# Altium PCB Main.PcbDoc
Units mm, origin at the board's own origin, x right, y up, seen from the top; angles counter-clockwise.
Board outline 66.29 x 57.53 mm, 2 copper layers (Top Layer, Bottom Layer); 28 components, 26 nets, 129 pads, 41 vias.
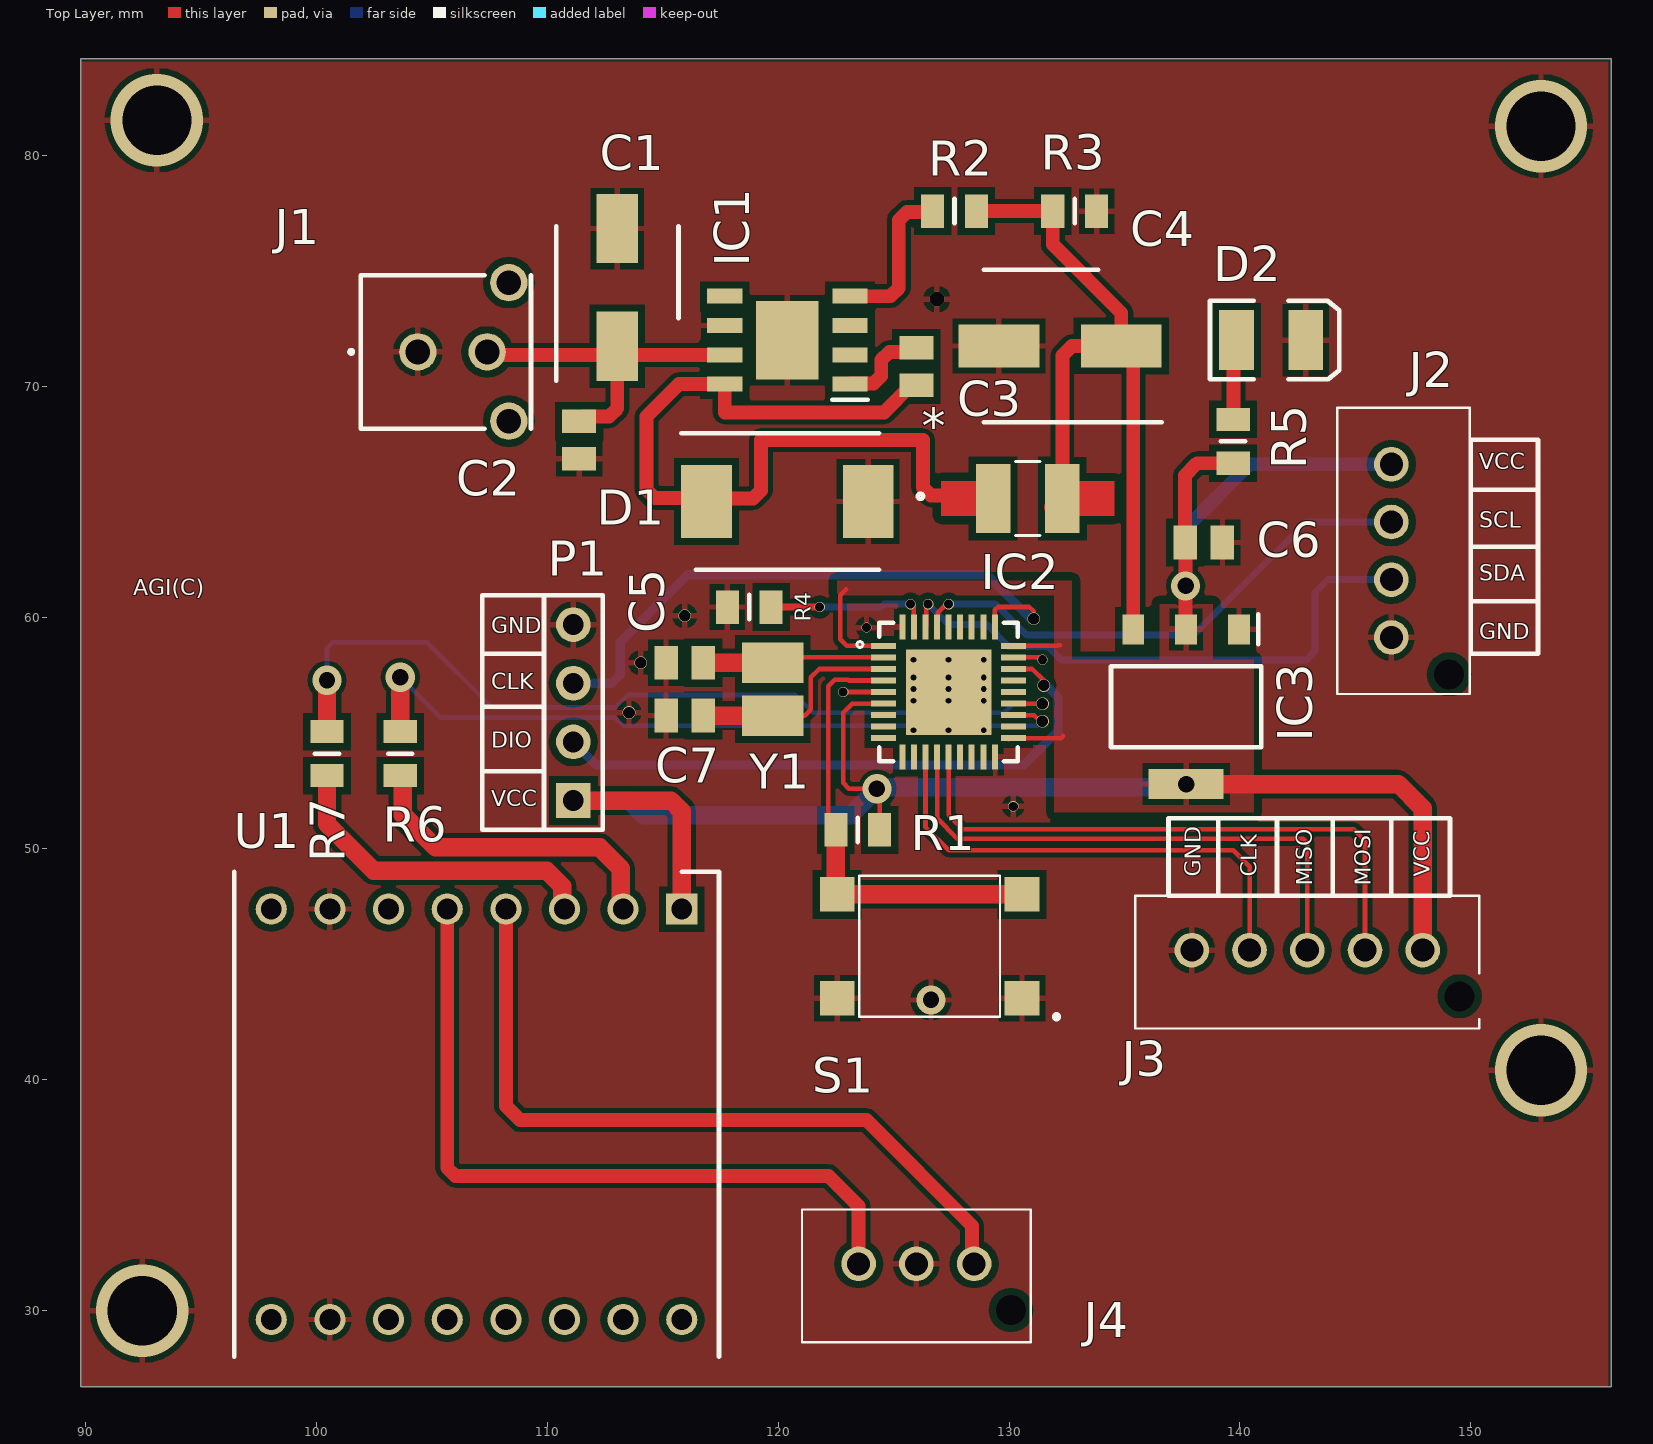
[diagram p0: Top Layer view]
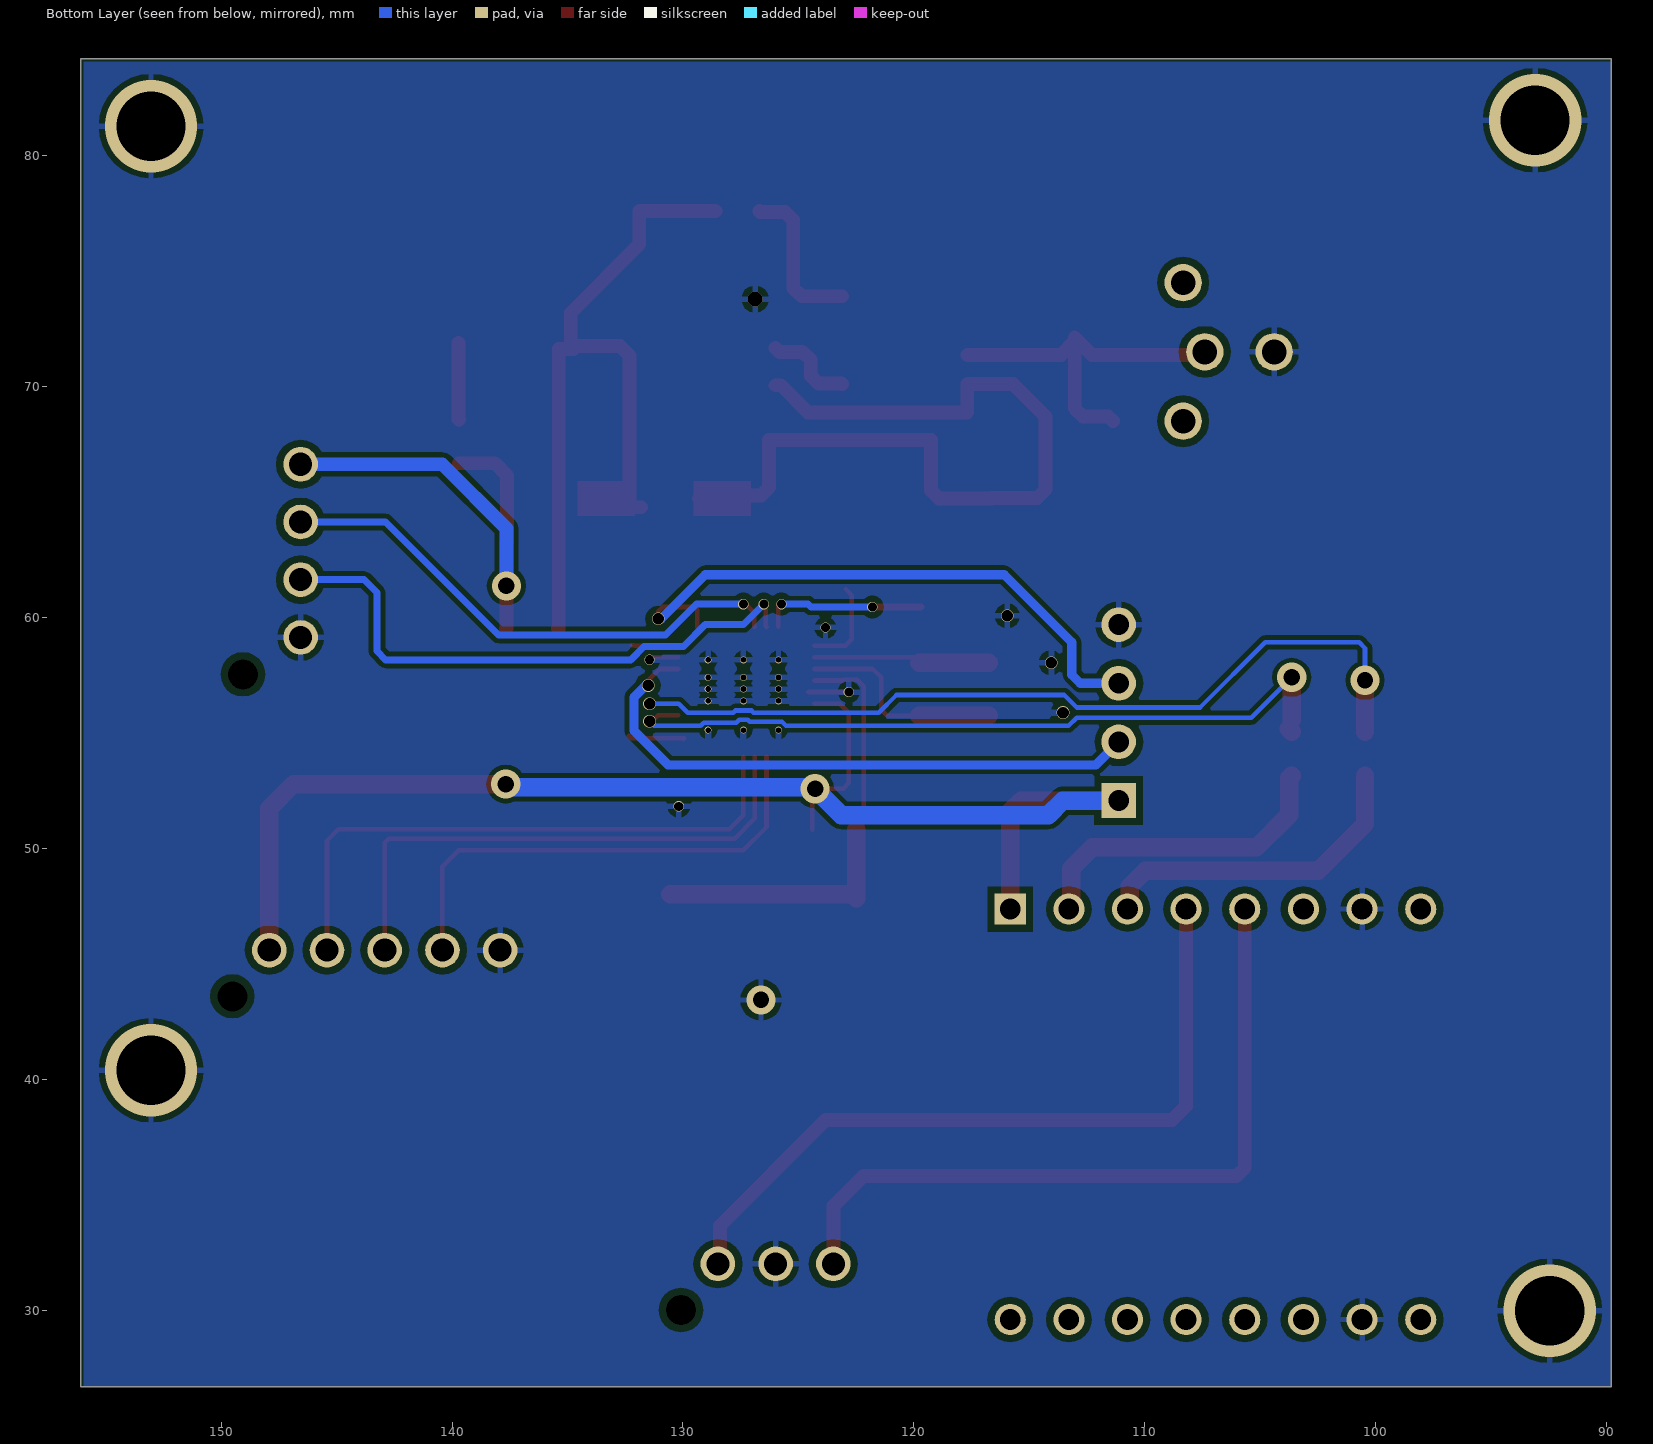
[diagram p1: Bottom Layer view, seen from below]
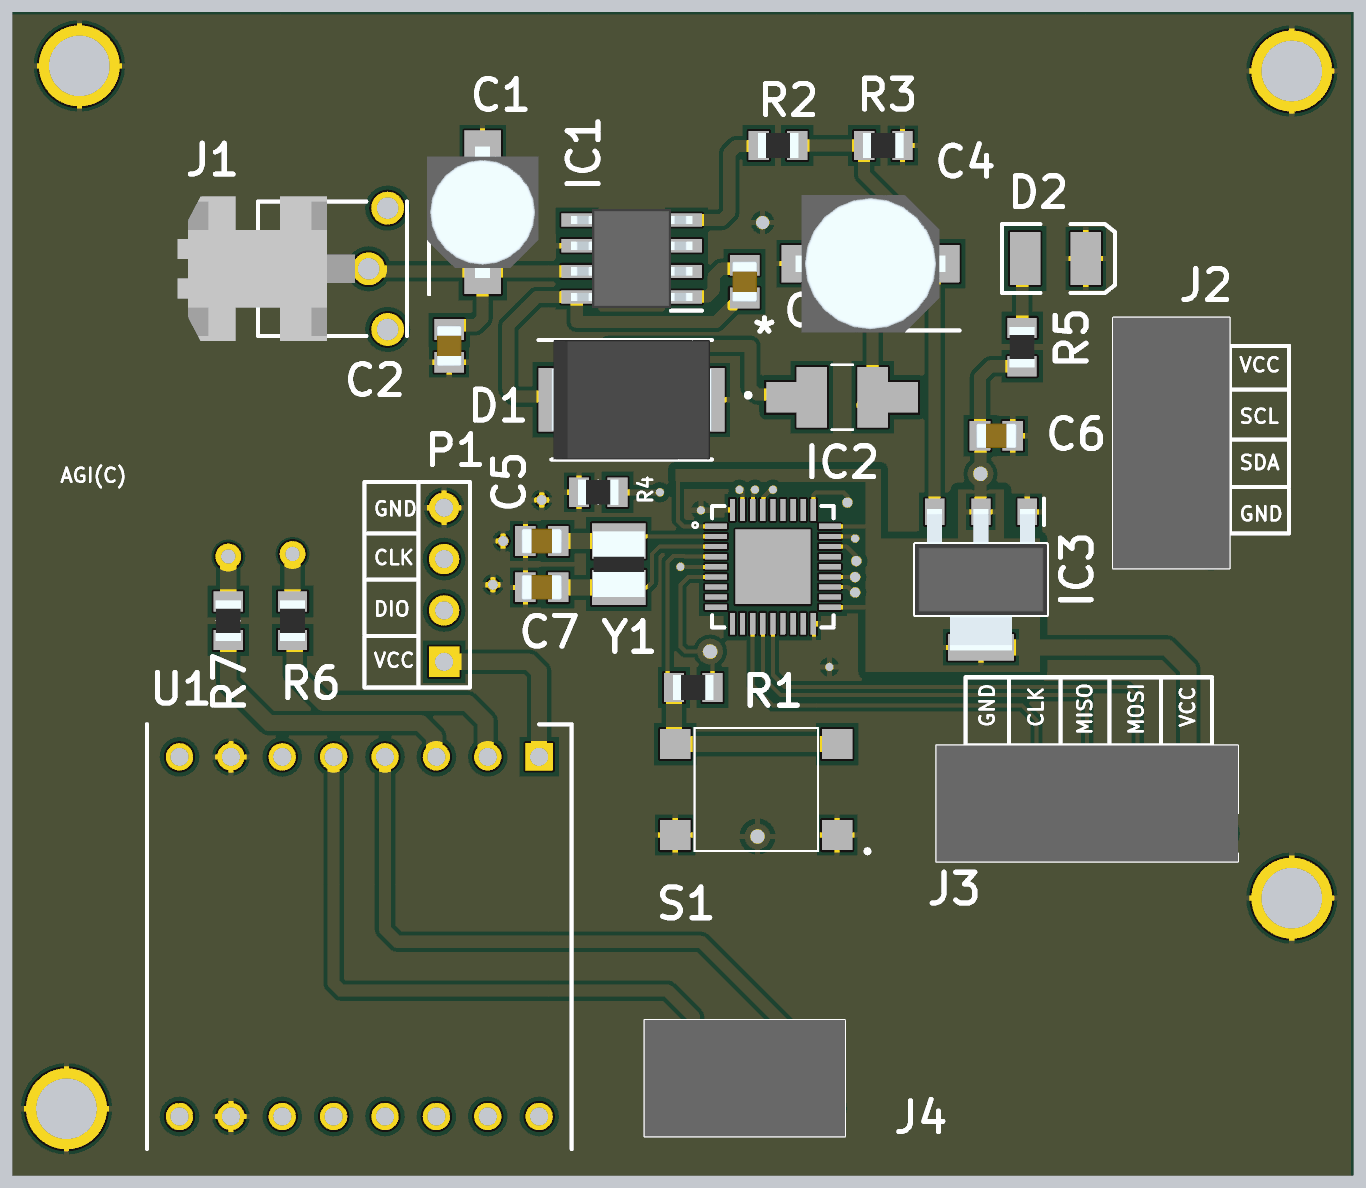
[diagram p2: 3D render of the assembled board from above, using the file's embedded part models]

## Layer stack, top to bottom
Top Solder: solder mask 0.0102, Solder Resist, Dk 3.5
Top Layer: signal copper 0.0356
Dielectric 1: dielectric 0.32, FR-4, Dk 4.8
Bottom Layer: signal copper 0.0356
Bottom Solder: solder mask 0.0102, Solder Resist, Dk 3.5

## Board outline
89.789,26.67 89.789,84.201 156.083,84.201 156.083,26.67
cut-out: 158.877,83.82

## Design rules (kind name [scope] priority, off if disabled: settings)
Clearance [All] p1: gap=0.2 ignorepadtopadclearanceinfootprint=FALSE except(0.3: SMDPad-Fill SMDPad-Poly SMDPad-Region THPad-THPad THPad-Via THPad-Fill THPad-Poly THPad-Region THPad-Hole Fill-Hole Poly-Hole Region-Hole; 0.35: Fill-Fill Fill-Poly Fill-Region Poly-Poly Poly-Region Region-Region)
PolygonConnect [All] p1: connectstyle=Relief reliefconductorwidth=0.254 reliefentries=4 polygonreliefangle="90 Angle" airgapwidth=0.254
RoutingVias [All] p1: holewidth=0.711 width=1.27 viastyle="Through Hole" minholewidth=0.711 minwidth=1.27 maxholewidth=0.711 maxwidth=1.27
SolderMaskExpansion [All] p1: expansion=0.102
Width [All] p1: maxlimit=0.8 minlimit=0.2 preferedwidth=0.4
30 further rules are at their usual default settings.

## Components (designator, comment, footprint, x,y, rotation, side; value= is the part's Value field where it differs from the comment)
* "LQH43CN1R0M03L" *IND_LQH43CN1R0M03L 130.81,65.151 r0 top
C1 "EEE1EA4R7NR" CAPAE530X550N 113.03,74.295 r90 top
C2 "0805_22pf" CAPC2012X94N 111.379,67.691 r270 top
C3 "0805_22pf" CAPC2012X94N 125.984,70.866 r90 top
C4 "UUD1H270MCL1GS" CAPAE660X820N 132.207,71.755 r180 top
C5 "0805_22pf" CAPC2012X94N 115.951,58.039 r180 top
C6 "0805_22pf" CAPC2012X94N 138.43,63.246 r180 top
C7 "0805_22pf" CAPC2012X94N 115.951,55.753 r0 top
D1 "VS-30BQ015-M3_9AT" DIOM7959X262N 120.396,65.024 r0 top
D2 "LED3" 3.5X2.8X1.9 141.351,72.009 r0 top
IC1 "LM22675MRE-5.0" SOIC127P600X170-9N 120.396,72.009 r180 top
IC2 "STM32F103T8U6" *QFN50P600X600X100-37N 127.381,56.769 r0 top
IC3 "ams1117-3.3v" SOT229P700X180-4N 137.668,56.134 r270 top
J1 "0430450212" 0430450212 101.924,71.501 r270 top
J2 "B4B-XH-AM" B4BXHAMLFSN 146.558,66.635 r270 top
J3 "B5B-XH-AM" B5BXHAMLFSN 147.915,45.593 r180 top
J4 "B3B-XH-AM" B3BXHAMLFSN 125.984,34.354 r180 top
P1 "Header 4" HDR1X4 111.125,52.07 r90 top
R1 "10k_0805" RESC2012X65N 123.444,50.8 r0 top
R2 "0805_0" RESC2012X65N 127.635,77.597 r0 top
R3 "0805_0" RESC2012X65N 132.842,77.597 r0 top
R4 "10k_0805" RESC2012X65N 118.745,60.452 r180 top
R5 "0805_0" RESC2012X65N 139.7,67.63 r270 top
R6 "10k_0805" RESC2012X65N 103.632,54.102 r270 top
R7 "10k_0805" RESC2012X65N 100.457,54.102 r270 top
S1 "TSA063G50-250" TSA063G50250 126.556,45.756 r180 top
U1 "DFR0299" DIPS1778W50P254L2100H170Q16N 115.824,47.371 r270 top
Y1 "NX3225GD" RESC3226X100N 119.761,56.896 r270 top

## Footprints (in the part's own frame and the unit in brackets; to place one, negate y for a bottom-side part, rotate by r counter-clockwise, add the part's x,y. Pads: shape width x height; smd on the part's side, far side on the other; paste and mask are expansions set on the pad)
3.5X2.8X1.9 [mm] "SM LED; 2 C-Bend Leads; Body 3.5 x 2.8 x 1.9 mm, inc leads (LxWxH typ)"
  rect 1.5x2.6 smd: 1(-1.5,0) 2(1.5,0)
  silkscreen extent -2.65,-1.7 2.95,1.7
0430450212 [mm]
  round 1.62 hole 1.07: 1(0,2.47) 2(0,5.47) 3(-3,6.41) 4(3,6.41)
  silkscreen extent -3.32,-0.49 3.32,7.37, body extent -3.57,-3.97 3.57,4.8, height 4.95
*IND_LQH43CN1R0M03L [mm]
  rect 1.5x3 smd: 1(-1.5,0) 2(1.5,0)
  Top Layer region: -3.75,0.75 -1.27,0.75 -1.27,-0.75 -3.75,-0.75
  Top Layer region: 1.27,0.75 3.75,0.75 3.75,-0.75 1.27,-0.75
  silkscreen extent -4.76,-1.6 0.53,1.6
*QFN50P600X600X100-37N [mm]
  rect 1.08x0.26 smd: 1(-2.815,2) 2(-2.815,1.5) 3(-2.815,1) 4(-2.815,0.5) 5(-2.815,0) 6(-2.815,-0.5) 7(-2.815,-1) 8(-2.815,-1.5) 9(-2.815,-2) 19(2.815,-2) 20(2.815,-1.5) 21(2.815,-1) 22(2.815,-0.5) 23(2.815,0) 24(2.815,0.5) 25(2.815,1) 26(2.815,1.5) 27(2.815,2)
  rect 0.26x1.08 smd: 10(-2,-2.815) 11(-1.5,-2.815) 12(-1,-2.815) 13(-0.5,-2.815) 14(0,-2.815) 15(0.5,-2.815) 16(1,-2.815) 17(1.5,-2.815) 18(2,-2.815) 28(2,2.815) 29(1.5,2.815) 30(1,2.815) 31(0.5,2.815) 32(0,2.815) 33(-0.5,2.815) 34(-1,2.815) 35(-1.5,2.815) 36(-2,2.815)
  rect 3.7x3.7 smd: 37(0,0)
  silkscreen extent -3.97,-3 3,3
B3BXHAMLFSN [mm]
  round 1.5 hole 1: 1(-2.5,2.35) 2(0,2.35) 3(2.5,2.35)
  round 0.65 hole 1.3 unplated: 4(-4.1,4.35)
  silkscreen extent -4.95,0 4.95,5.75, body extent -4.95,0 4.95,5.75, height 7
B4BXHAMLFSN [mm]
  round 1.5 hole 1: 1(0,0) 2(2.5,0) 3(5,0) 4(7.5,0)
  round 0.65 hole 1.3 unplated: MH1(9.1,2.5)
  silkscreen extent -2.45,-2.35 9.95,3.4, body extent -2.45,-2.35 9.95,3.4, height 7
B5BXHAMLFSN [mm]
  round 1.5 hole 1: 1(0,0) 2(2.5,0) 3(5,0) 4(7.5,0) 5(10,0)
  round 0.65 hole 1.3 unplated: MH1(-1.6,2)
  silkscreen extent -2.45,-2.35 12.45,3.4, body extent -2.45,-2.35 12.45,3.4, height 7
CAPAE530X550N [mm]
  rect 3x1.8 smd: 1(-2.55,0) 2(2.55,0)
  silkscreen extent -4.05,-2.65 2.65,2.65, body extent -3.25,-2.75 3.25,2.75, height 5.5
CAPAE660X820N [mm]
  rect 3.5x1.85 smd: 1(-2.65,0) 2(2.65,0)
  silkscreen extent -4.4,-3.3 3.3,3.3, body extent -3.7,-3.4 3.7,3.4, height 8.2
CAPC2012X94N [mm]
  rect 1.02x1.47 smd: 1(-0.81,0) 2(0.81,0)
  body extent -1,-0.63 1,0.63, height 0.94
DIOM7959X262N [mm]
  rect 2.2x3.15 smd: 1(-3.5,0) 2(3.5,0)
  silkscreen extent -4.6,-2.95 3.97,2.95, body extent -3.97,-2.95 3.97,2.95, height 2.62
DIPS1778W50P254L2100H170Q16N [mm]
  rect 1.35x1.35 hole 0.9: 1(0,0)
  round 1.35 hole 0.9: 2(0,-2.54) 3(0,-5.08) 4(0,-7.62) 5(0,-10.16) 6(0,-12.7) 7(0,-15.24) 8(0,-17.78) 9(17.78,-17.78) 10(17.78,-15.24) 11(17.78,-12.7) 12(17.78,-10.16) 13(17.78,-7.62) 14(17.78,-5.08) 15(17.78,-2.54) 16(17.78,0)
  silkscreen extent -1.61,-19.39 19.39,1.61
HDR1X4 [mm] "Connector; Header; 4 Position"
  rect 1.5x1.5 hole 0.9: 1(0,0)
  round 1.5 hole 0.9: 2(2.54,0) 3(5.08,0) 4(7.62,0)
  silkscreen extent -1.27,-1.27 8.89,1.27
RESC2012X65N [mm]
  rect 1x1.45 smd: 1(-0.95,0) 2(0.95,0)
  silkscreen extent 0,-0.53 0,0.53, body extent -1,-0.63 1,0.63, height 0.65
RESC3226X100N [mm]
  rect 1.75x2.65 smd: 1(-1.15,0) 2(1.15,0)
  body extent -1.63,-1.28 1.63,1.28, height 1
SOIC127P600X170-9N [mm]
  rect 1.525x0.65 smd: 1(-2.712,1.905) 2(-2.712,0.635) 3(-2.712,-0.635) 4(-2.712,-1.905) 5(2.712,-1.905) 6(2.712,-0.635) 7(2.712,0.635) 8(2.712,1.905)
  rect 2.71x3.4 smd: 9(0,0)
  silkscreen extent -3.47,2.58 -1.95,2.58, body extent -3,-2.45 3,2.45, height 1.7
SOT229P700X180-4N [mm]
  rect 1.3x0.95 smd: 1(-3.35,2.29) 2(-3.35,0) 3(-3.35,-2.29)
  rect 1.3x3.25 smd: 4(3.35,0)
  silkscreen extent -4,-3.25 1.75,3.25, body extent -3.5,-3.25 3.5,3.25, height 1.8
TSA063G50250 [mm]
  rect 1.5x1.5 smd: 1(-4,2.25) 2(4,2.25) 3(-4,-2.25) 4(4,-2.25)
  silkscreen extent -5.55,-3.05 3.05,3.1

## Part data
*: library part Component_1
C1: "Capacitor Polarised", Manufacturer_Name=Panasonic, Datasheet Link=https://datasheet.lcsc.com/szlcsc/1901071134_PANASONIC-EEE1EA4R7NR_C336510.pdf, Height=5.5mm, Manufacturer_Part_Number=EEE1EA4R7NR
C2 C3 C5 C6 C7: library part 08055A101JAT2A, "Capacitor", Manufacturer_Name=AVX, Mouser Part Number=581-08055A101J, RS Part Number=0391000P, Allied_Number=70474488, Allied Price/Stock=https://www.alliedelec.com/avx-08055a101jat2a/70474488/, Datasheet Link=https://componentsearchengine.com/Datasheets/1/06031A100FAT2A.pdf, Height=0.94mm, Manufacturer_Part_Number=08055A101JAT2A, Mouser Price/Stock=https://www.mouser.com/Search/Refine.aspx?Keyword=581-08055A101J, RS Price/Stock=http://uk.rs-online.com/web/p/products/0391000P
C4: "Capacitor Polarised", Manufacturer_Name=Nichicon, Mouser Part Number=647-UUD1H270MCL, Datasheet Link=http://www.nichicon.co.jp/english/products/pdfs/e-uud.pdf, Height=8.2mm, Manufacturer_Part_Number=UUD1H270MCL1GS, Mouser Price/Stock=https://www.mouser.com/Search/Refine.aspx?Keyword=647-UUD1H270MCL
D1: "Schottky Diode", Manufacturer_Name=Vishay, Manufacturer_Part_Number=VS-30BQ015-M3/9AT, Mouser Part Number=78-VS-30BQ015-M39AT, RS Part Number=5431623P, Datasheet Link=https://www.vishay.com/docs/93359/vs-30bq015m.pdf, Height=2.62mm, Mouser Price/Stock=https://www.mouser.com/Search/Refine.aspx?Keyword=78-VS-30BQ015-M39AT, RS Price/Stock=http://uk.rs-online.com/web/p/products/5431623P
D2: "Typical BLUE SiC LED", DatasheetVersion=16-Apr-2002, LatestRevisionDate=17-Dec-2003, LatestRevisionNote="PCB Footprint replaced.", PackageDescription="SM LED; 2 C-Bend Leads; Body 3.5 x 2.8 x 1.9 mm, inc leads (LxWxH typ)", PackageReference=3.5X2.8X1.9, PackageVersion=16-Apr-2002, Published=8-Jun-2000, Publisher="Altium Limited"
IC1: library part LM22675MRE-5.0_NOPB, "Integrated Circuit", Manufacturer_Name="Texas Instruments", Manufacturer_Part_Number=LM22675MRE-5.0/NOPB, Mouser Part Number=926-LM22675MRE50NOPB, RS Part Number=7615463P, Datasheet Link=http://www.ti.com/lit/gpn/lm22675, Height=1.7mm, Mouser Price/Stock=https://www.mouser.com/Search/Refine.aspx?Keyword=926-LM22675MRE50NOPB, RS Price/Stock=http://uk.rs-online.com/web/p/products/7615463P
IC2: "Integrated Circuit", Manufacturer_Name=STMicroelectronics, Mouser Part Number=511-STM32F103T8U6, RS Part Number=7249612P, Allied_Number=70391018, Allied Price/Stock=http://www.alliedelec.com/stmicroelectronics-stm32f103t8u6/70391018/, Datasheet Link=http://www.st.com/st-web-ui/static/active/en/resource/technical/document/datasheet/CD00161566.pdf, Height=1mm, Manufacturer_Part_Number=STM32F103T8U6, Mouser Price/Stock=https://www.mouser.com/Search/Refine.aspx?Keyword=511-STM32F103T8U6, RS Price/Stock=http://uk.rs-online.com/web/p/products/7249612P
IC3: "Integrated Circuit", Manufacturer_Name="Advanced Monolithic Systems", Datasheet Link=http://www.advanced-monolithic.com/pdf/ds1117.pdf, Height=1.8mm, Manufacturer_Part_Number=ams1117-3.3v
J1: "Connector", Manufacturer_Name=Molex, Datasheet Link=http://www.molex.com/pdm_docs/sd/430450212_sd.pdf, Manufacturer_Part_Number=0430450212
J2: library part B4B-XH-AM_(LF)(SN), "Connector", Manufacturer_Name="JST (JAPAN SOLDERLESS TERMINALS)", Manufacturer_Part_Number="B4B-XH-AM (LF)(SN)", RS Part Number=1755445, Datasheet Link=http://www.jst-mfg.com/product/pdf/eng/eXH.pdf, Height=7mm, RS Price/Stock=http://uk.rs-online.com/web/p/products/1755445
J3: library part B5B-XH-AM_(LF)(SN), "Connector", Manufacturer_Name="JST (JAPAN SOLDERLESS TERMINALS)", Manufacturer_Part_Number="B5B-XH-AM (LF)(SN)", RS Part Number=1755489, Datasheet Link=http://uk.rs-online.com/web/p/products/1755317, Height=7mm, RS Price/Stock=http://uk.rs-online.com/web/p/products/1755489
J4: library part B3B-XH-AM(LF)(SN), "Connector", Manufacturer_Name="JST (JAPAN SOLDERLESS TERMINALS)", Datasheet Link=http://www.jst-mfg.com/product/pdf/eng/eXH.pdf, Height=7mm, Manufacturer_Part_Number=B3B-XH-AM(LF)(SN)
P1: "Header, 4-Pin", LatestRevisionDate=17-Jul-2002, LatestRevisionNote="Re-released for DXP Platform.", Publisher="Altium Limited"
R1 R2 R3 R4 R5 R6 R7: library part CPF0805B100KE, "Resistor", Manufacturer_Name="TE Connectivity", Mouser Part Number=279-CPF0805B100KE, RS Part Number=6662673, Allied_Number=70286772, Allied Price/Stock=https://www.alliedelec.com/te-connectivity-cpf0805b100ke/70286772/, Datasheet Link=http://docs-europe.electrocomponents.com/webdocs/13d1/0900766b813d116f.pdf, Height=0.65mm, Manufacturer_Part_Number=CPF0805B100KE, Mouser Price/Stock=https://www.mouser.com/Search/Refine.aspx?Keyword=279-CPF0805B100KE, RS Price/Stock=https://uk.rs-online.com/web/p/products/6662673
S1: "Switch", Manufacturer_Name=BRIGHT, Datasheet Link=https://datasheet.lcsc.com/szlcsc/BRIGHT-TSA063G50-250_C294565.pdf, Height=5.2mm, Manufacturer_Part_Number=TSA063G50-250
U1: "Undefined or Miscellaneous", Manufacturer_Name=DFRobot, Mouser Part Number=426-DFR0299, Datasheet Link=https://github.com/Arduinolibrary/DFPlayer_Mini_mp3/raw/master/DFPlayer%20Mini%20Manual.pdf, Height=1.7mm, Manufacturer_Part_Number=DFR0299, Mouser Price/Stock=https://www.mouser.com/Search/Refine.aspx?Keyword=426-DFR0299
Y1: library part NX3225GD-8MHZ-STD-CRA-3, "Crystal or Oscillator", Manufacturer_Name=NDK, Mouser Part Number=344-NX3225GD8MCRA3, RS Part Number=1847983, Datasheet Link=http://www.ndk.com/images/products/catalog/c_NX3225GD-STD-CRA-3_e.pdf, Height=1mm, Manufacturer_Part_Number=NX3225GD-8MHZ-STD-CRA-3, Mouser Price/Stock=https://www.mouser.com/Search/Refine.aspx?Keyword=344-NX3225GD8MCRA3, RS Price/Stock=http://uk.rs-online.com/web/p/products/1847983

## Via types
v1: diameter 0.3, hole 0.25, Top Layer to Bottom Layer, tented bottom, 15 vias
v2: diameter 0.45, hole 0.4, Top Layer to Bottom Layer, tented both sides, 8 vias
v3: diameter 0.55, hole 0.5, Top Layer to Bottom Layer, tented both sides, 4 vias
v4: diameter 4, hole 3, Top Layer to Bottom Layer, 4 vias
v5: diameter 1.27, hole 0.711, Top Layer to Bottom Layer, 3 vias
v6: diameter 1.27, hole 0.711, Top Layer to Bottom Layer, tented both sides, 3 vias
v7: diameter 0.55, hole 0.5, Top Layer to Bottom Layer, 3 vias
v8: diameter 0.65, hole 0.65, Top Layer to Bottom Layer, tented both sides, 1 vias

## Nets (pads, with @x,y where several pads share a name; then routed paths per layer and width w, separated by ;. In a path a pad name is that pad's centre, name@x,y a point inside that pad or via, vN(x,y) a via of type N, cw(c..) or ccw(c..) an arc to the next point about the centre after c; other vN are vias at no path point)
+3.3V: C6.2 IC2.1 IC2.6 IC2.19 IC2.27 IC3.2 IC3.4 J2.1 J3.1 P1.1 R1.2 R5.2 U1.1 | length 91.7
  Top Layer w0.2: 122.936,61.214 122.682,60.96 122.682,59.055 122.968,58.769 IC2.1@124.312,58.769 ; IC2.6@124.312,56.269 123.198,56.269 122.809,55.88 122.809,52.832 123.063,52.578 v6(124.277,52.578) 124.394,52.461 R1.2 ; IC2.27@129.942,58.769 IC2.27 132.09,58.769 132.122,58.801 132.207,58.801 ; IC2.19@129.974,54.737 129.942,54.769 IC2.19 132.239,54.769 132.334,54.864
  Top Layer w0.6: IC3.2 137.644,59.508 v6(137.644,61.365) 137.644,63.222 C6.2 137.62,66.154 138.146,66.68 R5.2
  Top Layer w0.8: P1.1 115.355,52.07 115.824,51.601 U1.1 ; v5(137.668,52.784) 146.86,52.784 147.915,51.729 J3.1
  Bottom Layer w0.6: v6(137.644,61.365) 137.644,63.857 140.422,66.635 J2.1
  Bottom Layer w0.8: P1.1 113.538,52.07 114.173,51.435 123.134,51.435 v6(124.277,52.578) 124.34,52.641 137.398,52.641 137.541,52.784 v5(137.668,52.784)
+5V: *.2 C4.1 IC3.3 R2.2 R3.1 | length 32.6
  Top Layer w0.6: R2.2 R3.1 131.892,76.147 134.857,73.182 C4.1 132.715,71.755 132.31,71.35 *.2 ; *.2@131.802,64.77 *.2@132.31,64.77 ; C4.1@134.73,71.628 135.378,71.628 IC3.3 IC3.3@135.417,59.523
BOOT0: IC2.35 R4.1 | length 7.1
  Top Layer w0.2: IC2.35@125.869,59.596 v2@125.869,60.567
  Top Layer w0.3: R4.1 v2(121.793,60.452)
  Bottom Layer w0.3: v2(121.793,60.452) 124.46,60.452 124.587,60.579 v2(125.73,60.579)
DF_BUSY: U1.16
DF_RX: IC2.21 R6.1 | length 32.4
  Top Layer w0.2: IC2.21 131.08,55.769 131.35,55.499 v3(131.445,55.499)
  Top Layer w0.8: R6.1 R6.1@103.759,55.179 ; 103.632,55.56 v5(103.632,57.404)
  Bottom Layer w0.2: v5(103.632,57.404) 105.376,55.66 112.945,55.66 113.3,55.305 125.535,55.305 125.71,55.48 127.107,55.48 127.195,55.568 127.567,55.568 127.694,55.441 129.091,55.441 129.227,55.305 131.251,55.305 v3(131.445,55.499)
DF_RX_RAW: R6.2 U1.2 | length 14
  Top Layer w0.8: R6.2 103.642,53.152 103.742,53.052 103.742,51.452 105.156,50.038 112.268,50.038 113.179,49.127 113.179,47.476 U1.2
DF_TX: IC2.22 R7.1 | length 37.9
  Top Layer w0.2: IC2.22 130.2,56.265 131.433,56.265 131.437,56.261 v3(131.445,56.261)
  Top Layer w0.8: R7.1 v5(100.457,57.277)
  Bottom Layer w0.2: v5(100.457,57.277) 100.457,58.674 100.711,58.928 104.775,58.928 107.603,56.1 112.945,56.1 113.487,56.642 120.75,56.642 121.512,55.88 126.941,55.88 127.029,55.968 127.733,55.968 127.821,55.88 129.794,55.88 130.175,56.261 v3(131.445,56.261)
DF_TX_RAW: R7.2 U1.3 | length 14.4
  Top Layer w0.8: R7.2 100.457,51.054 102.473,49.038 109.966,49.038 110.639,48.365 110.639,47.476 U1.3
GND: C1.2 C2.2 C4.2 C5.2 C6.1 C7.1 D1.2 D2.2 IC1.6 IC1.9 IC2.5 IC2.18 IC2.26 IC2.36 IC2.37 IC3.1 J1.1 J2.4 J3.5 J4.2 P1.4 R3.2 R4.2 S1.1 S1.2 U1.7 U1.10 | length 3
  Top Layer w0.2: v2(122.809,56.769) IC2.5 ; IC2.26 131.274,58.269 131.377,58.166 v2(131.445,58.166)
  other v1: 125.857,55.118 127.381,55.118 128.905,55.118 125.857,56.388 127.381,56.388 128.905,56.388 125.857,56.896 127.381,56.896 128.905,56.896 125.857,57.404 127.381,57.404 128.905,57.404 125.857,58.166 127.381,58.166 128.905,58.166
  other v2: 130.175,51.816 123.825,59.563
  other v4: 92.456,29.972 153.035,40.386 153.035,81.28 93.091,81.534
  other v6: 126.619,43.434
  other v7: 113.538,55.88 114.046,58.039 115.951,60.071
  other v8: 126.873,73.787
I2C_SCL: IC2.33 J2.2 | length 23
  Top Layer w0.2: IC2.33 126.911,59.614 126.911,60.208 127.234,60.531 127.333,60.531 v2(127.381,60.579)
  Bottom Layer w0.3: v2(127.381,60.579) 129.413,60.579 130.751,59.241 137.981,59.241 142.875,64.135 J2.2
I2C_SDA: IC2.34 J2.3 | length 25
  Top Layer w0.2: IC2.34 126.405,59.608 126.405,60.424 126.492,60.511 v2(126.492,60.579)
  Bottom Layer w0.3: v2(126.492,60.579) 127.381,59.69 129.032,59.69 129.981,58.741 131.683,58.741 132.258,58.166 142.875,58.166 143.256,58.547 143.256,61.087 143.804,61.635 J2.3
Net*_1: *.1 C3.1 D1.1 IC1.8 | length 36.9
  Top Layer w0.6: C3.1 125.759,70.056 124.582,68.879 117.684,68.879 IC1.8 115.697,70.104 114.3,68.707 114.3,65.532 114.651,65.181 116.612,65.181 116.642,65.151 118.902,65.151 119.253,65.502 119.253,67.691 126.268,67.691 126.268,65.629 126.619,65.278 129.183,65.278 *.1
NetC3_2: C3.2 IC1.1 | length 3.9
  Top Layer w0.6: IC1.1 123.133,70.129 124.134,70.129 124.46,70.455 124.46,71.15 124.811,71.501 125.809,71.501 C3.2
NetD2_1: D2.1 R5.1 | length 3.3
  Top Layer w0.6: R5.1 139.712,68.592 139.712,71.87 D2.1@139.724,71.882
NetIC1_4: IC1.4 R2.1 | length 6.8
  Top Layer w0.6: IC1.4 124.871,73.914 125.222,74.265 125.222,77.216 125.573,77.567 126.655,77.567 R2.1
NetJ4_1: J4.1 U1.4 | length 32.6
  Top Layer w0.6: U1.4 108.204,38.832 108.809,38.227 123.825,38.227 128.398,33.654 128.398,32.09 J4.1
NetJ4_3: J4.3 U1.5 | length 32.2
  Top Layer w0.6: U1.5 105.664,36.165 106.015,35.814 122.174,35.814 123.484,34.504 J4.3
OSC_IN: C5.1 IC2.2 Y1.1 | length 7.6
  Top Layer w0.2: Y1.1 119.984,58.269 IC2.2@124.312,58.269
  Top Layer w0.8: C5.1 116.765,58.043 119.757,58.043 Y1.1
OSC_OUT: C7.2 IC2.3 Y1.2 | length 9.2
  Top Layer w0.2: Y1.2 121.151,55.746 121.412,56.007 121.412,57.404 121.777,57.769 IC2.3@124.312,57.769
  Top Layer w0.8: C7.2 116.765,55.749 119.757,55.749 Y1.2
RST: IC2.4 R1.1 S1.3 S1.4 | length 19.6
  Top Layer w0.2: R1.1 122.174,51.12 122.174,57.023 122.445,57.294 123.026,57.294 123.051,57.269 IC2.4@124.312,57.269
  Top Layer w0.8: S1.4@122.492,47.843 122.493,47.844 R1.1 R1.1 ; S1.4 S1.3
SPI_MISO: IC2.13 J3.3 | length 23.8
  Top Layer w0.2: IC2.13 126.881,51.3 127.762,50.419 142.748,50.419 142.915,50.252 J3.3
SPI_MOSI: IC2.14 J3.2 | length 25.7
  Top Layer w0.2: IC2.14 127.381,51.435 127.997,50.819 144.926,50.819 145.415,50.33 J3.2
SPI_SCK: IC2.12 J3.4 | length 21.4
  Top Layer w0.2: IC2.12 126.381,50.911 127.381,49.911 139.7,49.911 140.415,49.196 J3.4
SWCLK: IC2.28 P1.3 | length 26.6
  Top Layer w0.2: IC2.28 129.385,59.588 129.385,60.335 129.502,60.452 130.877,60.452 131.064,60.265 v3(131.064,59.944)
  Bottom Layer w0.2: P1.3 P1.3@111.269,57.294
  Bottom Layer w0.4: P1.3 112.786,57.15 113.157,57.521 113.157,58.928 116.078,61.849 129.032,61.849 130.937,59.944 v3(131.064,59.944)
SWDIO: IC2.25 P1.2 | length 26
  Top Layer w0.2: IC2.25 131.007,57.769 131.505,57.271 v3(131.505,57.054)
  Bottom Layer w0.4: P1.2 112.122,53.613 130.641,53.613 132.12,55.092 132.12,56.541 131.607,57.054 v3(131.505,57.054)
VCC: C1.1 C2.1 IC1.7 J1.2 | length 15.7
  Top Layer w0.6: J1.2@107.394,71.628 107.648,71.374 112.278,71.374 112.84,71.936 113.03,72.126 113.03,71.974 113.63,71.374 IC1.7 ; C2.1 111.585,68.707 112.679,68.707 113.03,69.058 C1.1
pads on no net: IC1.2 IC1.3 IC1.5 IC2.7 IC2.8 IC2.9 IC2.10 IC2.11 IC2.15 IC2.16 IC2.17 IC2.20 IC2.23 IC2.24 IC2.29 IC2.30 IC2.31 IC2.32 J1.3 J1.4 J2.MH1 J3.MH1 J4.4 U1.6 U1.8 U1.9 U1.11 U1.12 U1.13 U1.14 U1.15

## Polygon pours and split planes (outlines as drawn)
GND on Top Layer (solid, pour order 4): 89.789,84.074 89.789,26.67 155.956,26.67 155.956,84.074
+3.3V on Top Layer (solid, pour order 2): 134.62,58.166 132.715,58.166 132.715,61.595 126.238,61.595 122.555,61.595 122.555,60.96 131.953,60.96 131.953,51.562 134.62,51.562
+3.3V on Top Layer (solid, pour order 0): 136.525,60.579 136.525,58.166 134.62,58.166 134.62,51.562 140.589,51.562 140.589,51.943 140.589,58.166 138.811,58.166 138.811,60.579
GND on Bottom Layer (solid, pour order 6): 89.789,84.074 89.789,26.67 155.956,26.67 155.956,84.074

## Silkscreen, mask and mechanical layers (free items; w line width, h text height)
Top Overlay:
  lines w0.2: 107.188,53.34 109.855,53.34 ; 107.188,58.42 109.855,58.42 ; 107.315,56.134 109.855,56.134 ; 109.855,50.8 107.571,50.8 107.442,50.8 107.188,50.8 107.188,51.054 107.188,60.96 109.855,60.96 ; 139.065,48.006 139.065,51.181 ; 141.605,48.006 141.605,51.181 ; 144.018,48.006 144.018,48.26 144.018,51.181 ; 146.558,48.006 146.558,48.26 146.558,51.181 ; 149.987,60.706 152.908,60.706 ; 149.987,63.055 152.908,63.055 ; 149.987,65.532 152.908,65.532 ; 136.906,47.943 149.098,47.943 149.098,49.21 149.098,49.657 149.098,51.308 136.906,51.308 136.906,51.181 136.906,47.943 ; 149.987,58.42 149.987,67.691 152.908,67.691 152.908,58.42 149.987,58.42
  text "VCC" at 150.368,66.421 h0.7
  text "SCL" at 150.368,63.881 h0.7
  text "SDA" at 150.368,61.595 h0.7
  text "AGI(C)" at 92.075,60.96 h0.7
  text "GND" at 107.569,59.309 h0.7
  text "GND" at 150.368,59.055 h0.7
  text "CLK" at 107.569,56.896 h0.7
  text "DIO" at 107.569,54.356 h0.7
  text "VCC" at 107.569,51.816 h0.7
  text "GND" at 138.303,48.768 h0.7 r90
  text "CLK" at 140.716,48.768 h0.7 r90
  text "VCC" at 148.209,48.768 h0.7 r90
  text "MISO" at 143.129,48.387 h0.7 r90
  text "MOSI" at 145.669,48.387 h0.7 r90
Mechanical 13:
  the board outline again, w0.254